# Altium PCB PCB1.PcbDoc
Units mil, origin at the board's own origin, x right, y up, seen from the top; angles counter-clockwise.
Board outline 4490 x 6775 mil, 4 copper layers (Top Layer, Layer 1, Layer 2, Bottom Layer), stack 23.756 mil thick; 20 components, 20 nets, 85 pads, 18 vias.
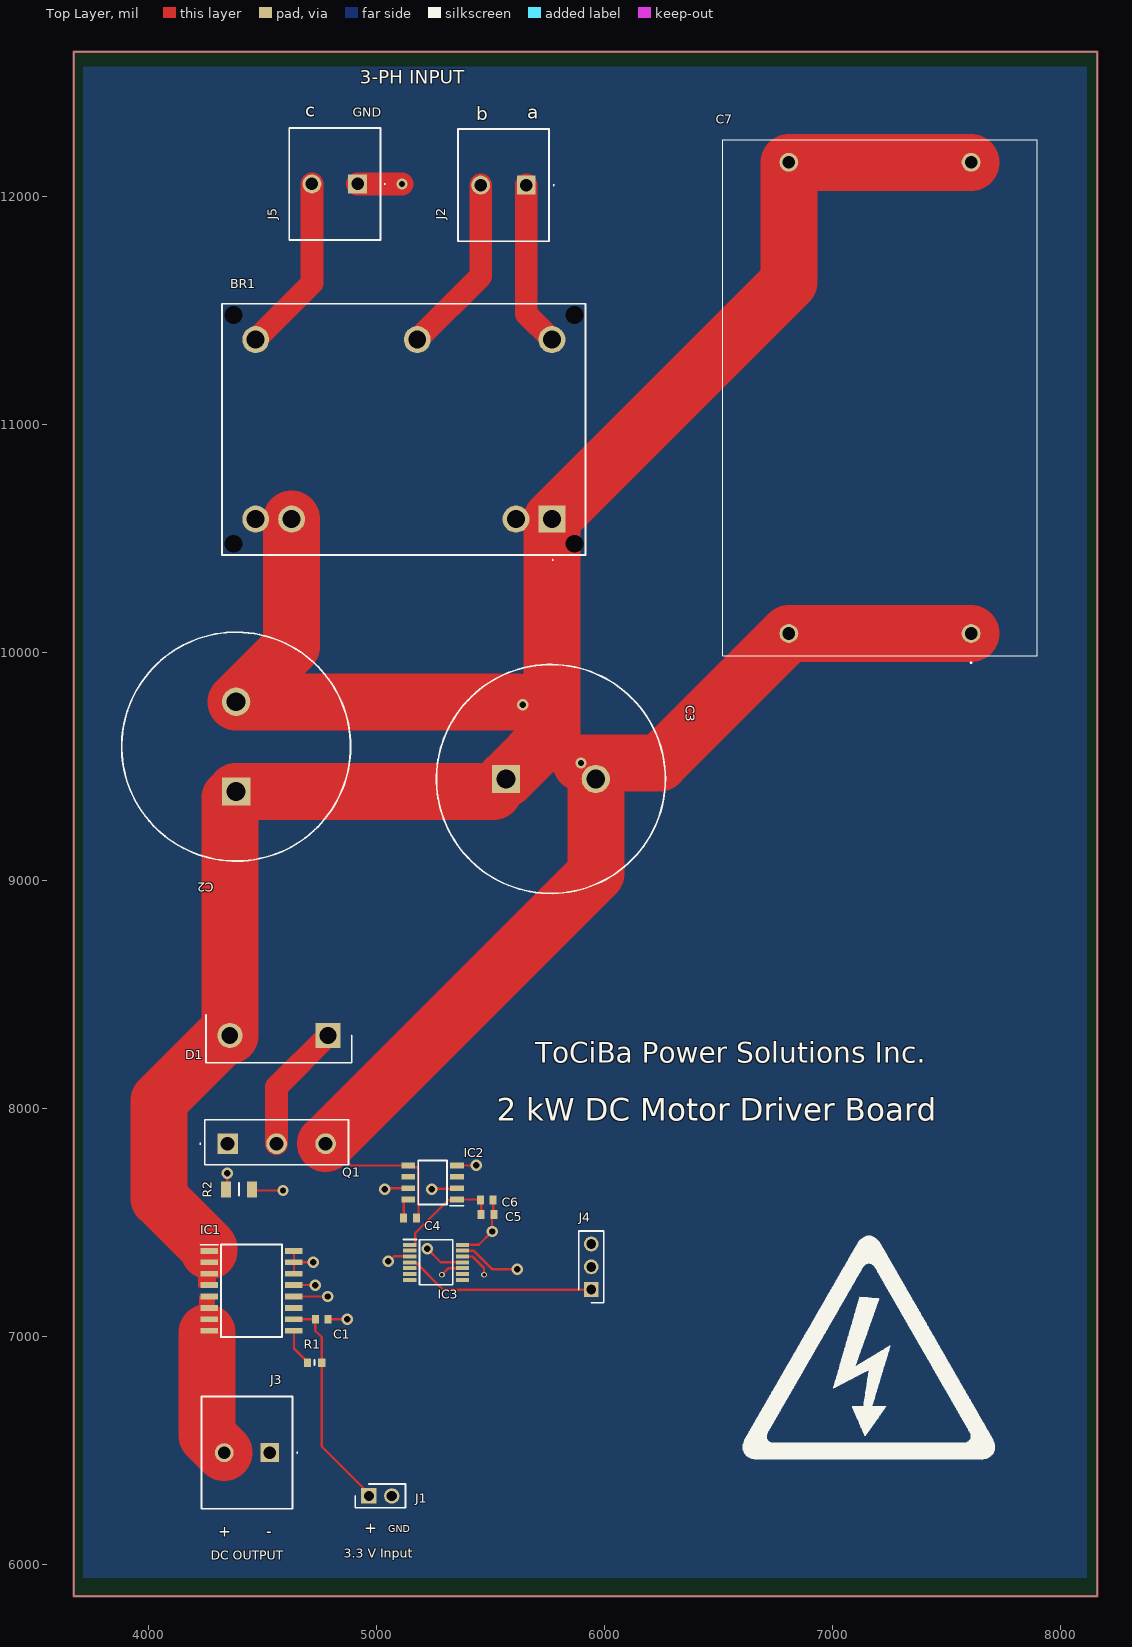
[diagram p0: Top Layer view]
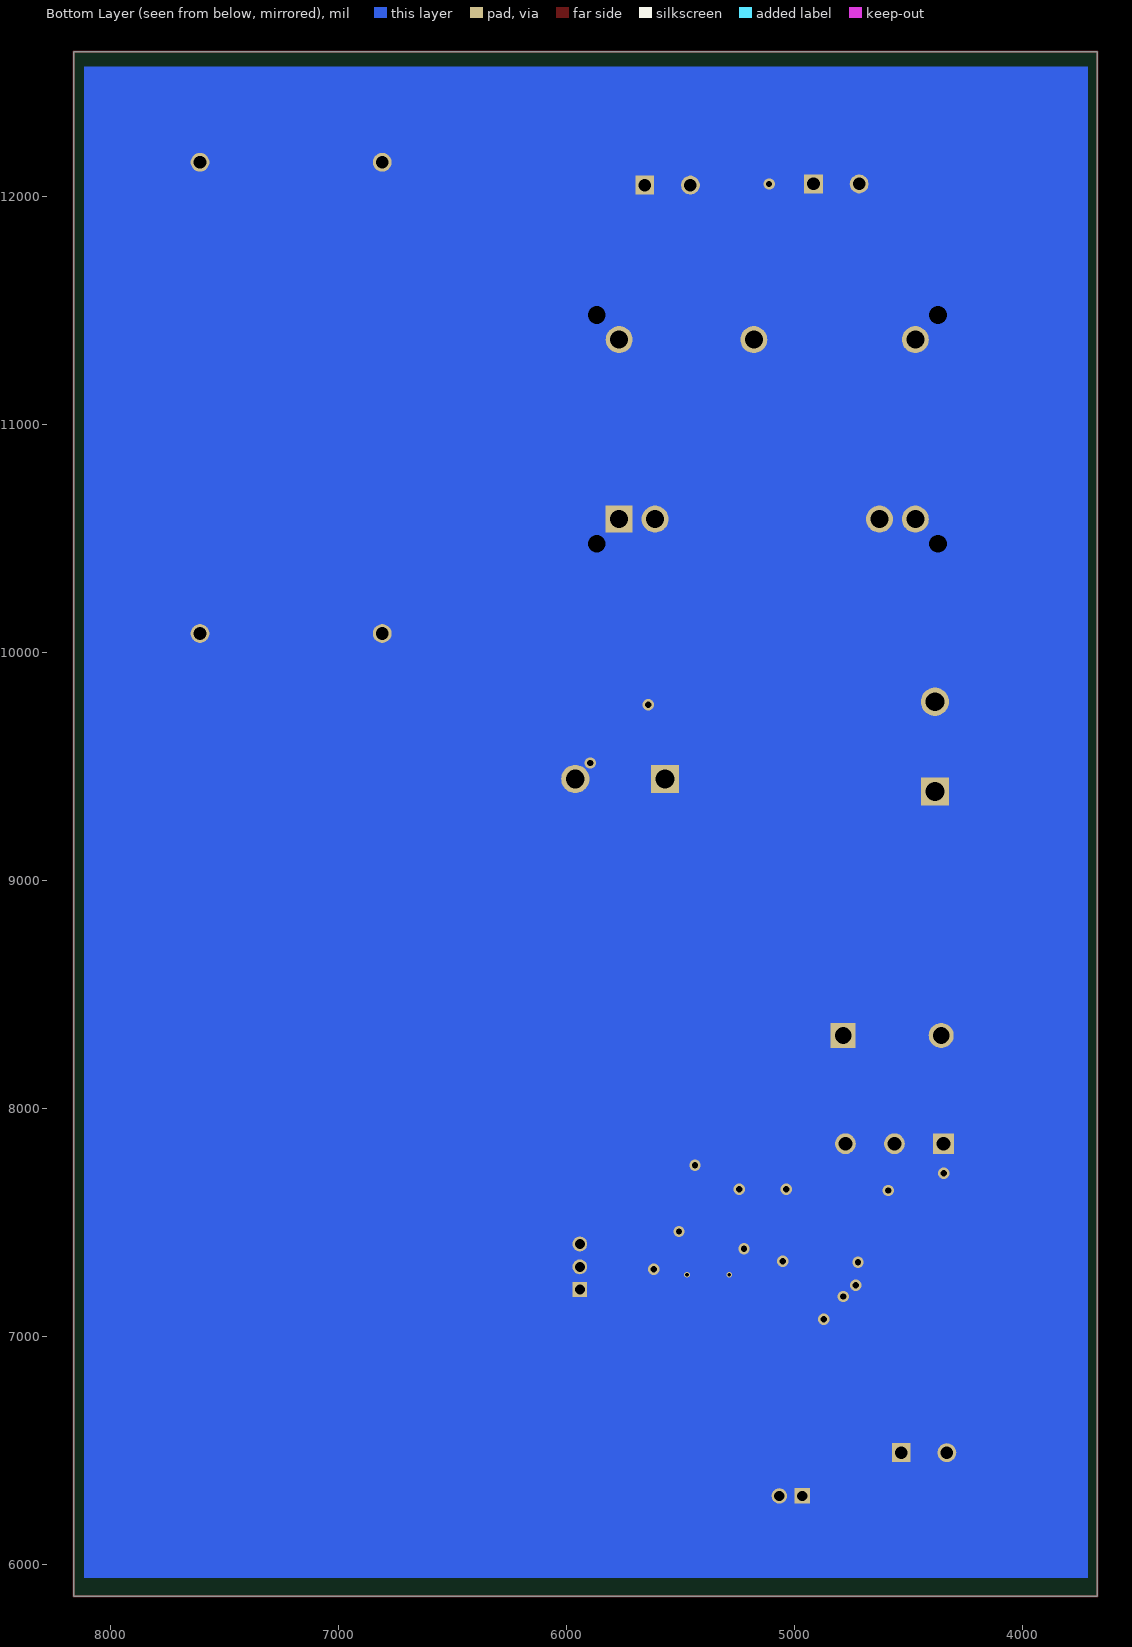
[diagram p1: Bottom Layer view, seen from below]
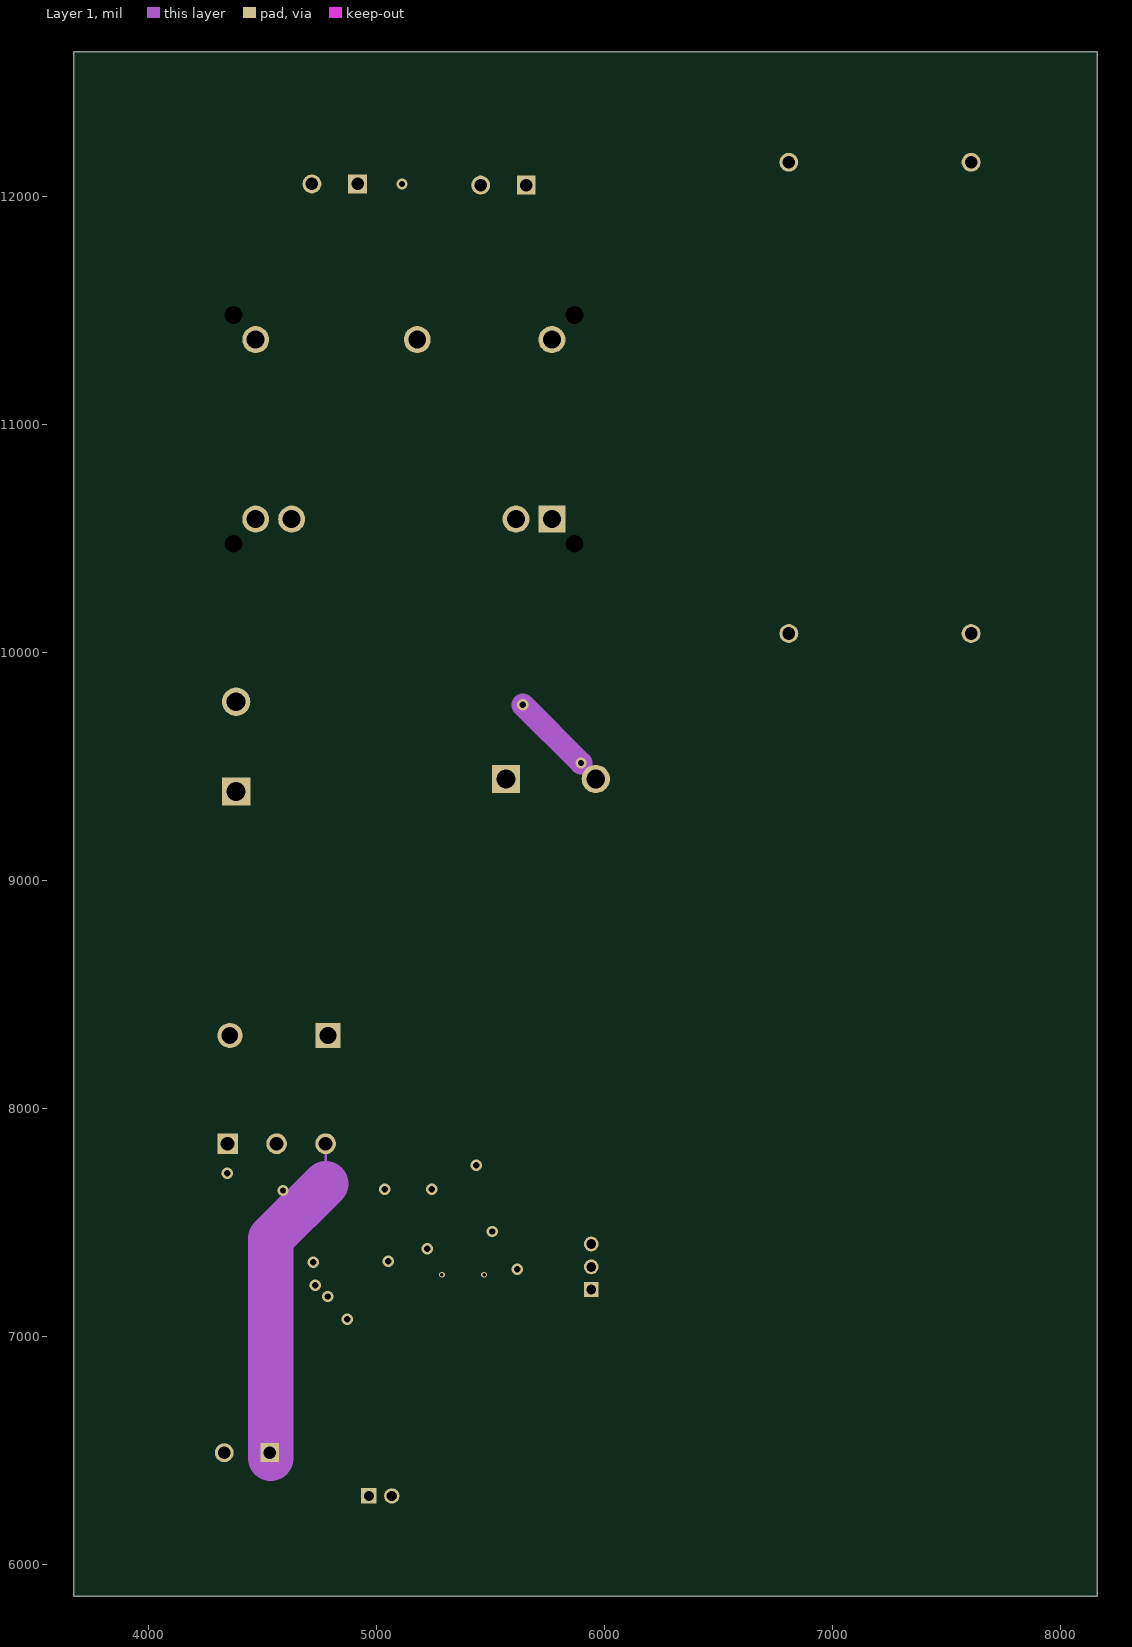
[diagram p2: Layer 1]
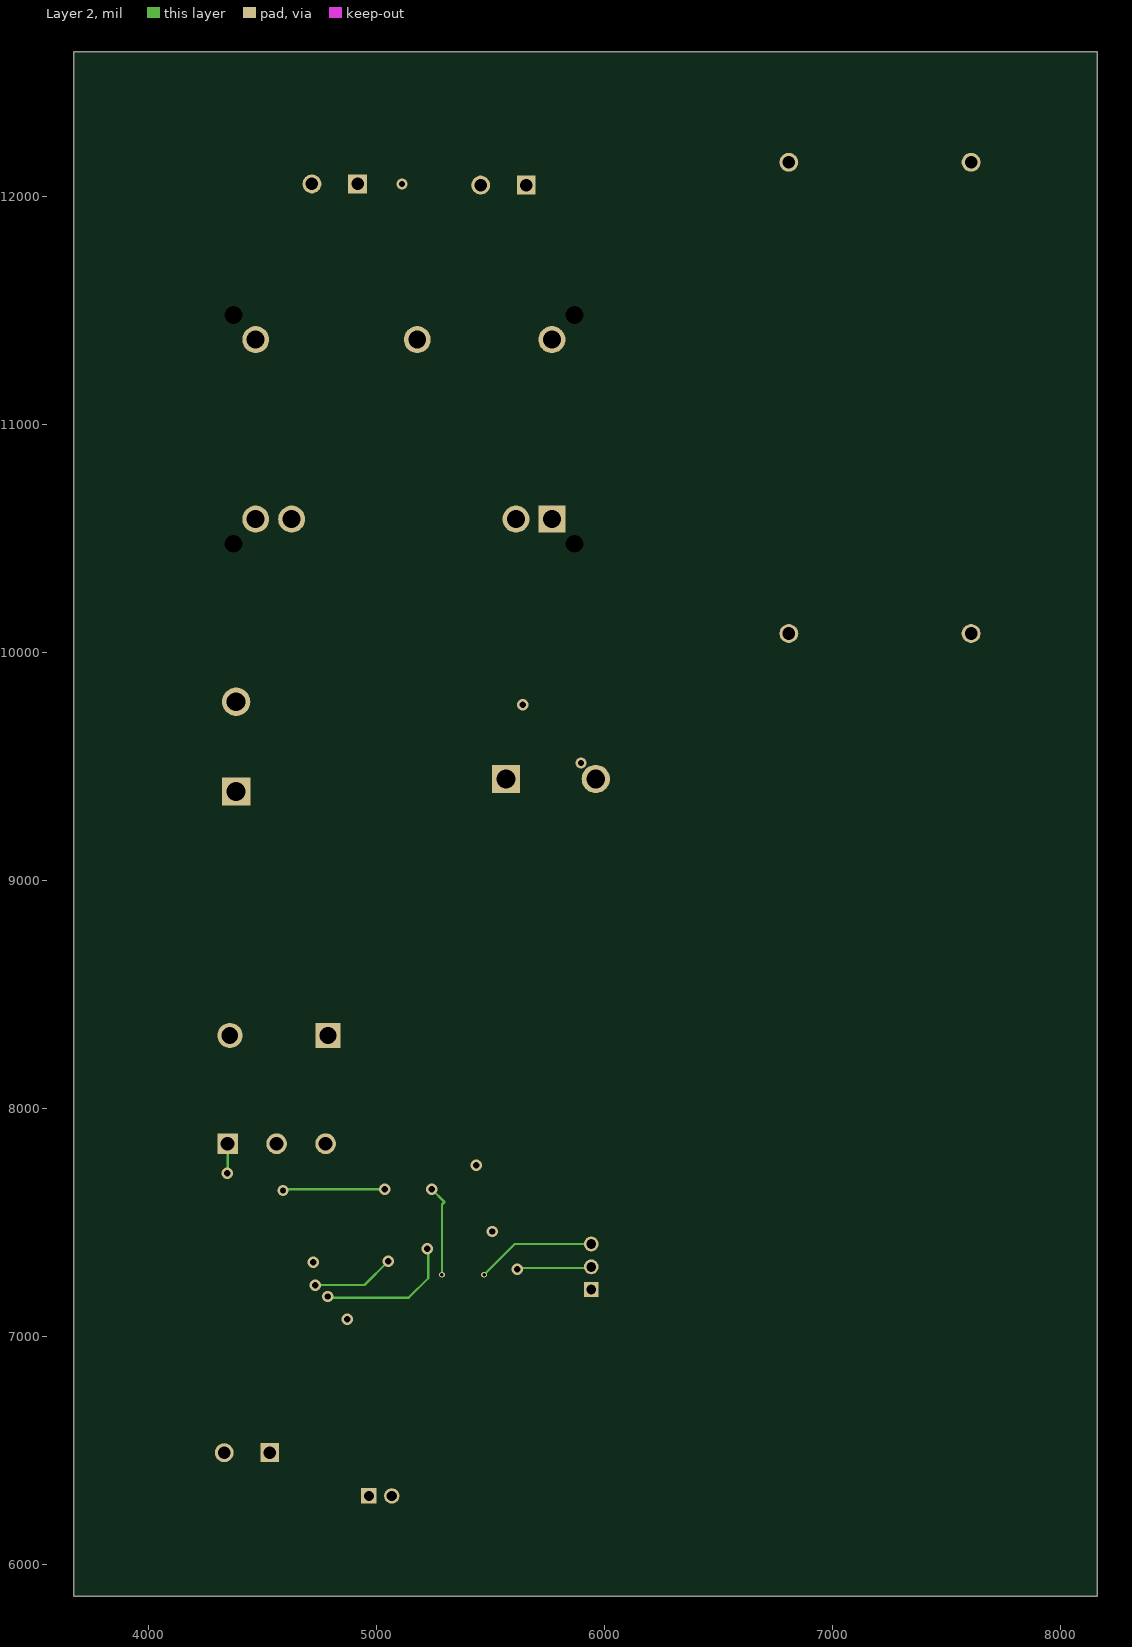
[diagram p3: Layer 2]

## Layer stack, top to bottom
Top Solder: solder mask 0.4, Solder Resist, Dk 3.5
Top Layer: signal copper 1.4
Dielectric 2: prepreg 2.8, PP-006, Dk 4.1
Layer 1: signal copper 1.378
Dielectric 1: dielectric 12.6, FR-4, Dk 4.8
Layer 2: signal copper 1.378
Dielectric 3: prepreg 2.8, PP-006, Dk 4.1
Bottom Layer: signal copper 1.4
Bottom Solder: solder mask 0.4, Solder Resist, Dk 3.5

## Board outline
3670,5860 3670,12635 8160,12635 8160,5860

## Design rules (kind name [scope] priority, off if disabled: settings)
AssemblyTestPointUsage [All] p1 off:
AssemblyTestpoint [All] p1 off: testpointundercomponent=TRUE minsize=40 maxsize=100 preferedsize=60 minholesize=0 maxholesize=40 preferedholesize=32 testpointgrid=1 usegrid=TRUE gridtolerance=0.01 allowsidetop=TRUE allowsidebottom=TRUE
Clearance Clearance_1 [All] p1 off: gap=10 ignorepadtopadclearanceinfootprint=FALSE except(0: Arc-Hole Track-Hole SMDPad-Hole THPad-Hole Via-Hole Fill-Hole Poly-Hole Region-Hole Text-Hole)
Clearance [All] p2 off: gap=50 ignorepadtopadclearanceinfootprint=FALSE
ComponentClearance [All] p1 off: gap=10 collisioncheckmode=3 verticalgap=10 showdistances=FALSE
DiffPairsRouting [All] p1 off: maxlimit=10 minlimit=10 mostfreqgap=10 toplayer_minwidth=15 toplayer_maxwidth=15 toplayer_prefwidth=15 midlayer1_minwidth=15 midlayer1_maxwidth=15 midlayer1_prefwidth=15 midlayer2_minwidth=15 midlayer2_maxwidth=15 midlayer2_prefwidth=15 bottomlayer_minwidth=15 bottomlayer_maxwidth=15 bottomlayer_prefwidth=15 maxuncoupledlength=500
FabricationTestPointUsage [All] p1 off: valid=0 allowmultiple=FALSE
FabricationTestpoint [All] p1 off: side=3 testpointundercomponent=TRUE minsize=40 maxsize=100 preferedsize=60 minholesize=0 maxholesize=40 preferedholesize=32 testpointgrid=1 allowsidetop=TRUE allowsidebottom=TRUE usegrid=TRUE gridtolerance=0.01
FanoutControl Fanout_BGA [IsBGA] p1 off: bgadir=Out bgaviamode=Centered fanoutstyle=Auto fanoutdirection=Alternating viagrid=1 // Fanout_BGA (Default Rule)
FanoutControl Fanout_LCC [IsLCC] p2 off: bgadir=Out bgaviamode=Centered fanoutstyle=Auto fanoutdirection=Alternating viagrid=1 // Fanout_LCC (Default Rule)
FanoutControl Fanout_SOIC [IsSOIC] p3 off: bgadir=Out bgaviamode=Centered fanoutstyle=Auto fanoutdirection=Alternating viagrid=1 // Fanout_SOIC (Default Rule)
FanoutControl Fanout_Small [(CompPinCount < 5)] p4 off: bgadir=Out bgaviamode=Centered fanoutstyle=Auto fanoutdirection=OutThenIn viagrid=1 // Fanout_Small (Default Rule)
FanoutControl Fanout_Default [All] p5 off: bgadir=Out bgaviamode=Centered fanoutstyle=Auto fanoutdirection=Alternating viagrid=1 // Fanout_Default (Default Rule)
Height [All] p1 off: minheight=0 maxheight=1000 prefheight=500
HoleSize [All] p1 off: absolutevalues=TRUE maxlimit=100 minlimit=1 maxpercent=80.000 minpercent=20.000
HoleToHoleClearance [All] p1 off: gap=10 allowstackedmicrovias=TRUE
LayerPairs [All] p1 off: enforce=TRUE
MinimumSolderMaskSliver [All] p1 off: minsoldermaskwidth=10
NetAntennae [All] p1 off: netantennaetolerance=0
PasteMaskExpansion [All] p1 off: expansion=0
PlaneClearance [All] p1 off: clearance=20
PlaneConnect [All] p1 off: planeconnectstyle=Relief reliefexpansion=20 reliefentries=4 reliefconductorwidth=10 reliefairgap=10
PolygonConnect [All] p1 off: connectstyle=Relief reliefconductorwidth=10 reliefentries=4 polygonreliefangle="90 Angle" airgapwidth=10
RoutingCorners [All] p1 off: cornerstyle=45-Degree minsetback=100 maxsetback=100
RoutingLayers [All] p1 off: top layer_v5=TRUE mid layer 1_v5=TRUE mid layer 2_v5=TRUE bottom layer_v5=TRUE
RoutingPriority [All] p1 off: routingpriority=0
RoutingTopology [All] p1 off: topology=Shortest
RoutingVias [All] p1 off: holewidth=28 width=50 viastyle="Through Hole" minholewidth=28 minwidth=50 maxholewidth=28 maxwidth=50
SilkToSilkClearance [All] p1 off: silktosilkclearance=10
SilkToSolderMaskClearance [IsPad] p1 off: minsilkscreentomaskgap=10 clearancetoexposedcopper=TRUE
SolderMaskExpansion [All] p1 off: expansion=4 istentingtop=FALSE
UnpouredPolygon [All] p1 off:
Width [All] p1 off: maxlimit=10 minlimit=10 preferedwidth=10
3 further rules are at their usual default settings.

## Components (designator, comment, footprint, x,y, rotation, side; value= is the part's Value field where it differs from the comment)
BR1 "SK70D08" SK70D08 5767.48,10585 r180 top
C1 "CL10B104KB8NNNC" CAPC1608X90N 4757.44,7075 r0 top
C2 "B43547A9107M000" CAPPRD1000W190D2550H2700 4382.34,9390 r90 top
C3 "B43547A9107M000" CAPPRD1000W190D2550H2700 5566.3,9445 r0 top
C4 "GRM188C80G106KE47D" CAPC1608X90N 5145,7520 r0 top
C5 "06032A101FAT2A" CAPC1608X90N 5485,7535 r0 top
C6 "06033C393KAT2A" CAPC1608X90N 5482.56,7598.16 r0 top
C7 "C4AEGBW6100A3NJ" C4AEGBW6100A3NJ 7606.14,10083.07 r90 top
D1 "DSEI30-06A" TO1092P530X1586X2594-2P 4784.92,8320 r180 top
IC1 "ACS37002KMABTR-050B5-00" SOIC127P1030X265-16N 4450,7200 r0 top
IC2 "NCD57085DR2G" SOIC127P600X175-8N 5244.22,7675 r180 top
IC3 "PIC16F1614-E_ST" SOP65P640X120-14N 5260,7325 r0 top
J1 "M20-9990246" HDRV2W66P0X254_1X2_508X254X874P 4965,6300 r0 top
J2 "2MA-02" 2MA02 5655,12050 r180 top
J3 "2MA-02" 2MA02 4530,6490 r180 top
J4 "G800LR305018EU" HDRV3W64P0X254_1X3_762X250X1082P 5940,7205 r90 top
J5 "2MA-02" 2MA02 4915,12055 r180 top
Q1 "IXGH30N60C2D1" IXGH30N60C2D1 4345.04,7845 r0 top
R1 "CR0603-FX-1002GLF" RESC1608X55N 4726.5,6885 r0 top
R2 "KTR18EZPF2R20" RESC3216X65N 4395,7645 r180 top

## Footprints (in the part's own frame and the unit in brackets; to place one, negate y for a bottom-side part, rotate by r counter-clockwise, add the part's x,y. Pads: shape width x height; smd on the part's side, far side on the other; paste and mask are expansions set on the pad)
2MA02 [mm]
  rect 2.1x2.1 hole 1.4: 1(0,0)
  round 2.1 hole 1.4: 2(5.08,0)
  silkscreen extent -3.1,-6.25 7.62,6.25, body extent -2.58,-6.25 8.08,6.25, height 14.97
C4AEGBW6100A3NJ [mm]
  round 2.1 hole 1.4: 1(0,0) 2(52.5,0) 3(52.5,20.3) 4(0,20.3)
  silkscreen extent -3.3,-7.35 55,27.65, body extent -2.5,-7.35 55,27.65, height 50.1
CAPC1608X90N [mm]
  rect 0.78x0.99 smd: 1(-0.7,0) 2(0.7,0)
  body extent -0.8,-0.41 0.8,0.41, height 0.9
CAPPRD1000W190D2550H2700 [mm]
  rect 3.15x3.15 hole 2.1: 1(0,0)
  round 3.15 hole 2.1: 2(10,0)
  silkscreen extent -7.75,-12.75 17.75,12.75, body extent -12.41,-17.41 22.41,17.41, height 28
HDRV2W66P0X254_1X2_508X254X874P [mm]
  rect 1.725x1.725 hole 1.15: 1(0,0)
  round 1.725 hole 1.15: 2(2.54,0)
  silkscreen extent -1.52,-1.32 4.06,1.32, body extent -1.27,-1.27 3.81,1.27, height 8.74
HDRV3W64P0X254_1X3_762X250X1082P [mm]
  rect 1.65x1.65 hole 1.1: 1(0,0)
  round 1.65 hole 1.1: 2(2.54,0) 3(5.08,0)
  silkscreen extent -1.47,-1.4 6.55,1.4, body extent -1.27,-1.25 6.35,1.25, height 10.62
IXGH30N60C2D1 [mm]
  rect 2.31x2.31 hole 1.54: 1(0,0)
  round 2.31 hole 1.54: 2(5.46,0) 3(10.92,0)
  silkscreen extent -3.1,-2.33 13.46,2.67, body extent -2.54,-2.33 13.46,2.67, height 26.06
RESC1608X55N [mm]
  rect 0.8x0.95 smd: 1(-0.8,0) 2(0.8,0)
  silkscreen extent 0,-0.3 0,0.3, body extent -0.8,-0.01 0.8,0.54, height 0.39
RESC3216X65N [mm]
  rect 1.15x1.8 smd: 1(-1.45,0) 2(1.45,0)
  silkscreen extent 0,-0.7 0,0.7, body extent -1.6,-0.8 1.6,0.8, height 0.65
SK70D08 [mm]
  rect 3x3 hole 2: 1(0,0)
  round 3 hole 2: 2(4,0) 7(29,0) 8(33,0) 9(0,-20) 12(15,-20) 16(33,-20)
  round 1 hole 2 unplated: MH1(-2.5,2.75) MH2(35.5,2.75) MH3(-2.5,-22.75) MH4(35.5,-22.75)
  silkscreen extent -3.75,-24 36.75,4.6, body extent -3.75,-24 36.75,4, height 12.1
SOIC127P600X175-8N [mm]
  rect 1.525x0.65 smd: 1(-2.712,1.905) 2(-2.712,0.635) 3(-2.712,-0.635) 4(-2.712,-1.905) 5(2.712,-1.905) 6(2.712,-0.635) 7(2.712,0.635) 8(2.712,1.905)
  silkscreen extent -3.47,-2.45 1.6,2.58, body extent -3,-2.45 3,2.45, height 1.75
SOIC127P1030X265-16N [mm]
  rect 1.95x0.65 smd: 1(-4.725,4.445) 2(-4.725,3.175) 3(-4.725,1.905) 4(-4.725,0.635) 5(-4.725,-0.635) 6(-4.725,-1.905) 7(-4.725,-3.175) 8(-4.725,-4.445) 9(4.725,-4.445) 10(4.725,-3.175) 11(4.725,-1.905) 12(4.725,-0.635) 13(4.725,0.635) 14(4.725,1.905) 15(4.725,3.175) 16(4.725,4.445)
  silkscreen extent -5.7,-5.15 3.4,5.15, body extent -5.15,-5.15 5.15,5.15, height 2.65
SOP65P640X120-14N [mm]
  rect 1.475x0.45 smd: 1(-2.938,1.95) 2(-2.938,1.3) 3(-2.938,0.65) 4(-2.938,0) 5(-2.938,-0.65) 6(-2.938,-1.3) 7(-2.938,-1.95) 8(2.938,-1.95) 9(2.938,-1.3) 10(2.938,-0.65) 11(2.938,0) 12(2.938,0.65) 13(2.938,1.3) 14(2.938,1.95)
  silkscreen extent -3.67,-2.5 1.85,2.53, body extent -3.2,-2.5 3.2,2.5, height 1.2
TO1092P530X1586X2594-2P [mm]
  rect 2.79x2.79 hole 1.86: 1(0,0)
  round 2.79 hole 1.86: 2(10.92,0)
  silkscreen extent -2.66,-2.27 13.58,3.03, body extent -2.47,-2.26 13.39,3.04, height 25.61

## Part data
BR1: "Bridge Rectifier", Manufacturer_Name=Semikron, Datasheet Link=https://shop.semikron-danfoss.com/thyristor-dioden-module/semitop-/sk-70-d-08.html, Height=12mm, Manufacturer_Part_Number=SK70D08
C1: "Capacitor", Manufacturer_Name=SAMSUNG, Mouser Part Number=187-CL10B104KB8NNNC, Arrow Part Number=CL10B104KB8NNNC, Arrow Price/Stock=https://www.arrow.com/en/products/cl10b104kb8nnnc/samsung-electro-mechanics?region=nac, Datasheet Link=https://datasheet.datasheetarchive.com/originals/distributors/Datasheets-DGA10/2408969.pdf, Height=0.9mm, Manufacturer_Part_Number=CL10B104KB8NNNC, Mouser Price/Stock=https://www.mouser.co.uk/ProductDetail/Samsung-Electro-Mechanics/CL10B104KB8NNNC?qs=349EhDEZ59rvGc2rLwVOdA%3D%3D
C2 C3: "Capacitor Polarised", Manufacturer_Name=TDK, Mouser Part Number=871-B43547A9107M000, Datasheet Link=https://datasheet.datasheetarchive.com/originals/distributors/Datasheets_SAMA/cd912998c374446e8a207df35f28d060.pdf, Height=27mm, Manufacturer_Part_Number=B43547A9107M000, Mouser Price/Stock=https://www.mouser.co.uk/ProductDetail/EPCOS-TDK/B43547A9107M000?qs=OiaALIbqWFRvXNUybej1lA%3D%3D
C4: "Capacitor", Manufacturer_Name="Murata Electronics", Mouser Part Number=81-GRM188C80G106KE7D, Arrow Part Number=GRM188C80G106KE47D, Arrow Price/Stock=https://www.arrow.com/en/products/grm188c80g106ke47d/murata-manufacturing?region=nac, Datasheet Link=http://componentsearchengine.com/Datasheets/1/GRM188C80G106KE47D.pdf, Height=0.9mm, Manufacturer_Part_Number=GRM188C80G106KE47D, Mouser Price/Stock=https://www.mouser.co.uk/ProductDetail/Murata-Electronics/GRM188C80G106KE47D?qs=eeBpzGFlv%252B88kEI%2FLClYhQ%3D%3D
C5: "Capacitor", Manufacturer_Name="Kyocera AVX", Mouser Part Number=581-06032A101FAT2A, Datasheet Link=https://au.mouser.com/datasheet/2/40/C0GNP0_KGM-3216332.pdf, Height=0.9mm, Manufacturer_Part_Number=06032A101FAT2A, Mouser Price/Stock=https://www.mouser.co.uk/ProductDetail/KYOCERA-AVX/06032A101FAT2A?qs=%252BdQmOuGyFcFRs1jGRy%252Bx8A%3D%3D
C6: "Capacitor", Manufacturer_Name="Kyocera AVX", Mouser Part Number=581-06033C393K, Arrow Part Number=06033C393KAT2A, Arrow Price/Stock=https://www.arrow.com/en/products/06033c393kat2a/avx, Datasheet Link=https://componentsearchengine.com/Datasheets/1/06031A100FAT2A.pdf, Height=0.9mm, Manufacturer_Part_Number=06033C393KAT2A, Mouser Price/Stock=https://www.mouser.com/Search/Refine.aspx?Keyword=581-06033C393K
C7: "Capacitor", Manufacturer_Name=NISSEI, Height=50mm, Manufacturer_Part_Number=C4AEGBW6100A3NJ
D1: "Diode", Manufacturer_Name=LITTELFUSE, Mouser Part Number=747-DSEI30-06A, Arrow Part Number=DSEI30-06A, Arrow Price/Stock=https://www.arrow.com/en/products/dsei30-06a/littelfuse?region=europe, Datasheet Link=https://componentsearchengine.com/Datasheets/1/DSEI30-06A.pdf, Height=5.3mm, Manufacturer_Part_Number=DSEI30-06A, Mouser Price/Stock=https://www.mouser.co.uk/ProductDetail/IXYS/DSEI30-06A?qs=t7yjd2JO%2FgQS8P%252B4%2Fp1LgQ%3D%3D
IC1: "Integrated Circuit", Manufacturer_Name="Allegro Microsystems", Datasheet Link=https://www.allegromicro.com/en/products/sense/current-sensor-ics/zero-to-fifty-amp-integrated-conductor-sensor-ics/acs37002, Height=2.65mm, Manufacturer_Part_Number=ACS37002KMABTR-050B5-00
IC2: "Integrated Circuit", Manufacturer_Name=onsemi, Mouser Part Number=863-NCD57085DR2G, Datasheet Link=https://componentsearchengine.com/Datasheets/2/NCD57085DR2G.pdf, Height=1.75mm, Manufacturer_Part_Number=NCD57085DR2G, Mouser Price/Stock=https://www.mouser.co.uk/ProductDetail/onsemi/NCD57085DR2G?qs=iLbezkQI%252Bsho7DsU0W3Vvg%3D%3D
IC3: "Integrated Circuit", Arrow Part Number=PIC16F1614-E/ST, Manufacturer_Name=Microchip, Mouser Part Number=579-PIC16F1614-E/ST, Arrow Price/Stock=https://www.arrow.com/en/products/pic16f1614-est/microchip-technology, Datasheet Link=http://www.microchip.com/mymicrochip/filehandler.aspx?ddocname=en572830, Height=1.2mm, Manufacturer_Part_Number=PIC16F1614-E/ST, Mouser Price/Stock=https://www.mouser.co.uk/ProductDetail/Microchip-Technology/PIC16F1614-E-ST?qs=7PCaVhlmG1qOwWgwKHE1Tg%3D%3D
J1: "Connector", Manufacturer_Name=Harwin, Mouser Part Number=855-M20-9990246, Datasheet Link=https://cdn.harwin.com/pdfs/M20-999.pdf, Height=8.74mm, Manufacturer_Part_Number=M20-9990246, Mouser Price/Stock=https://www.mouser.co.uk/ProductDetail/Harwin/M20-9990246?qs=Jph8NoUxIfWjw4WmyRvzag%3D%3D
J2 J3 J5: "Connector", Manufacturer_Name="TE Connectivity", Mouser Part Number=571-15460742, Datasheet Link=https://octopart.com/datasheet/2ma-02-te+connectivity-39650644, Height=15.3mm, Manufacturer_Part_Number=2MA-02, Mouser Price/Stock=https://www.mouser.co.uk/ProductDetail/TE-Connectivity/2MA-02?qs=tYnqtB6%252BMT5HYbRtwiMoEw%3D%3D
J4: "Connector", Manufacturer_Name="Amphenol Communications Solutions", Mouser Part Number=523-G800LR305018EU, Datasheet Link=https://cdn.amphenol-cs.com/media/wysiwyg/files/documentation/datasheet/boardwiretoboard/bwb_agilbrick_2_54mm_btb_header_g800.pdf, Height=10.82mm, Manufacturer_Part_Number=G800LR305018EU, Mouser Price/Stock=https://www.mouser.co.uk/ProductDetail/Amphenol-Commercial-Products/G800LR305018EU?qs=PzGy0jfpSMsZaVkTJmYyRA%3D%3D
Q1: "Transistor IGBT", Manufacturer_Name=LITTELFUSE, Datasheet Link=https://pdf1.alldatasheet.com/datasheet-pdf/download/415159/IXYS/IXGH30N60C2D1.html, Height=25.96mm, Manufacturer_Part_Number=IXGH30N60C2D1
R1: "Resistor", Manufacturer_Name=Bourns, Mouser Part Number=652-CR0603FX-1002GLF, Arrow Part Number=CR0603-FX-1002GLF, Arrow Price/Stock=https://www.arrow.com/en/products/cr0603-fx-1002glf/bourns, Datasheet Link=https://www.bourns.com/pdfs/chpreztr.pdf, Height=0.55mm, Manufacturer_Part_Number=CR0603-FX-1002GLF, Mouser Price/Stock=https://www.mouser.com/Search/Refine.aspx?Keyword=652-CR0603FX-1002GLF
R2: "Resistor", Manufacturer_Name="ROHM Semiconductor", Mouser Part Number=755-KTR18EZPF2R20, Datasheet Link=http://rohmfs.rohm.com/en/products/databook/datasheet/passive/resistor/chip_resistor/ktr.pdf, Height=0.65mm, Manufacturer_Part_Number=KTR18EZPF2R20, Mouser Price/Stock=https://www.mouser.co.uk/ProductDetail/ROHM-Semiconductor/KTR18EZPF2R20?qs=Y0Uzf4wQF3nRNQ%2FJtyiNSA%3D%3D

## Via types
v1: diameter 50, hole 28, Top Layer to Bottom Layer, 16 vias
v2: diameter 25, hole 16, Top Layer to Bottom Layer, 2 vias

## Nets (pads, with @x,y where several pads share a name; then routed paths per layer and width w, separated by ;. In a path a pad name is that pad's centre, name@x,y a point inside that pad or via, vN(x,y) a via of type N, cw(c..) or ccw(c..) an arc to the next point about the centre after c; other vN are vias at no path point)
GND: C1.2 C5.2 C6.2 IC1.14 IC1.15 IC1.16 IC2.4 IC3.14 J1.2 J5.1 | length 843.7
  Top Layer w10: IC1.14 IC1.15 ; IC1.16 IC1.15 ; v1(4720,7325) IC1.15 ; C1.2 v1(4870,7075) ; IC2.4 v1(5435,7750) ; IC3.14 5446.77,7401.77 v1(5505,7460) 5505,7527.44 C5.2 5510.12,7537.44 C6.2
  Top Layer w100: J5.1 v1(5110,12055)
Ip-: IC1.5 IC1.6 IC1.7 IC1.8 J3.2 | length 789.9
  Top Layer w10: IC1.5 IC1.6 IC1.7 IC1.8 4289.57,7025 4330,6984.57
  Top Layer w250: IC1.8@4255,7016.02 4255,6565 J3.2
NetBR1_1: BR1.1 C2.1 C3.1 C7.2 C7.3 D1.2 IC1.1 IC1.2 IC1.3 IC1.4 | length 7484.9
  Top Layer w10: C2.1@4355,9362.66 C2.1 ; C3.1@5511.3,9390 C3.1
  Top Layer w100: D1.2@4328.12,8318.12 4353.12,8318.12 D1.2
  Top Layer w250: IC1.1 4263.98,7386.02 4045,7605 4045,8035 D1.2@4328.12,8318.12 ; D1.2 C2.1@4355,9362.66 ; C2.1 C3.1@5511.3,9390 ; C3.1 5767.48,9646.18 BR1.1 6806.92,11624.44 C7.3 C7.2
NetBR1_9: BR1.9 J2.1 | length 724.2
  Top Layer w100: J2.1 5655,11484.88 BR1.9
NetBR1_12: BR1.12 J2.2 | length 792.8
  Top Layer w100: BR1.12 5455,11650.47 J2.2
NetBR1_16: BR1.16 J5.2 | length 784.8
  Top Layer w100: BR1.16 4715,11619.13 J5.2
NetC1_1: C1.1 IC1.10 J1.1 R1.2 | length 991.6
  Top Layer w10: IC1.10 C1.1 4729.88,7025.12 4757.99,6997.01 R1.2 4757.99,6517.01 J1.1@4990,6285
NetC4_1: C4.1 IC2.8 | length 95.4
  Top Layer w10: C4.1 5117.44,7592.2 5125.24,7600 IC2.8
NetC5_1: C5.1 C6.1 IC2.1 IC3.1 | length 464.9
  Top Layer w10: IC3.1 5164.51,7401.77 5168.37,7405.63 5168.37,7453.37 5311.83,7596.83 5347.83,7596.83 IC2.1 ; IC2.1@5371.77,7600 5453.16,7600 C6.1 5457.44,7595.72 C5.1
NetD1_1: D1.1 Q1.2 | length 568.2
  Top Layer w100: Q1.2 4560,8095.08 D1.1
NetIC1_12: IC1.12 IC3.11 | length 938.8
  Top Layer w10: IC1.12 v1(4785,7175) ; v1(5220,7385) 5280,7325 IC3.11
  Layer 2 w10: v1(4785,7175) 4790,7170 5140,7170 5225,7255 5225,7380 v1(5220,7385)
NetIC2_2: IC2.2 IC3.10 | length 618.6
  Top Layer w10: v1(5240,7645) 5242.5,7647.5 5348.49,7647.5 IC2.2 ; v2(5285,7270) 5314.41,7299.41 IC3.10
  Layer 2 w10: v1(5240,7645) 5295.86,7589.14 5285,7578.28 v2(5285,7270)
NetJ4_1: IC3.4 J4.1 | length 845.4
  Top Layer w10: IC3.4 5147.72,7321.61 5173.39,7321.61 5290,7205 J4.1
NetJ4_2: IC3.13 J4.2 | length 602.1
  Top Layer w10: IC3.13 5423.82,7376.18 5505,7295 v1(5615,7295)
  Layer 2 w10: v1(5615,7295) 5620,7300 5935,7300 J4.2
NetJ4_3: IC3.12 J4.3 | length 676.2
  Top Layer w10: IC3.12 5419.41,7350.59 5470,7300 v2(5470,7270)
  Layer 2 w10: v2@5465,7270 v2(5470,7270) 5605,7405 J4.3
NetQ1_1: Q1.1 R2.2 | length 204.2
  Top Layer w10: R2.2 4342.95,7650.04 v1(4342.95,7715.04) ; Q1.1@4340,7839.96 Q1.1
  Layer 2 w10: v1@4345.04,7720.04 Q1.1
NetR1_1: IC1.9 R1.1 | length 164.4
  Top Layer w10: IC1.9 4636.02,6946.93 4695,6887.95 R1.1
NetR2_1: IC2.7 R2.1 | length 680.3
  Top Layer w10: R2.1 4457.09,7640 v1(4587.91,7640) ; v1@5040,7650 IC2.7
  Layer 2 w10: v1@4590,7645 v1(5035,7645)
RA4: IC1.13 IC3.3 | length 564.8
  Top Layer w10: IC1.13 v1(4730,7225) ; v1(5050,7330) 5054.16,7330 5075.86,7351.69 IC3.3@5148.31,7351.69
  Layer 2 w10: v1(4730,7225) 4945,7225 v1(5050,7330)
return: BR1.7 C2.2 C3.2 C4.2 C7.1 C7.4 IC2.5 J3.1 Q1.3 | length 8794.5
  Top Layer w10: Q1.3 4790,7845 4885,7750 IC2.5 5145.25,7742.2 5176.08,7742.2 5181.94,7736.35 C4.2@5181.94,7533.49 ; 5615.48,9783.7 5629.18,9770 v1(5640,9770)
  Top Layer w250: BR1.7 4625.75,10027.1 C2.2 5615.48,9783.7 ; Q1.3 5960,9030.04 C3.2 ; v1(5895,9515) 6238.85,9515 C7.4 C7.1
  Layer 1 w10: 4774.96,7669.96 Q1.3 ; v1(5895,9515) 5895,9512.5 5960,9447.5 C3.2
  Layer 1 w100: v1(5640,9770) v1(5895,9515)
  Layer 1 w200: J3.1@4535,6465 4535,7430 4774.96,7669.96
pads on no net: BR1.2 BR1.8 BR1.MH1 BR1.MH2 BR1.MH3 BR1.MH4 IC1.11 IC2.3 IC2.6 IC3.2 IC3.5 IC3.6 IC3.7 IC3.8 IC3.9
copper on no net: | length 22530
  Top Layer w10: 3670,5860 8160,5860 8160,12635 3670,12635 3670,5860

## Other copper
Top Layer:
  rectangle net Ip-: 4220,7025 4289.57,7180
  rectangle net NetBR1_1: 4215,7215 4295,7395
Bottom Layer:
  rectangle net GND: 3710,5940 8115,12570

## Silkscreen, mask and mechanical layers (free items; w line width, h text height)
Top Overlay:
  drawing of 2 lines, arcs and shapes, not listed
  text "3-PH INPUT" at 4925,12495 h60
  text "c" at 4685,12350 h60
  text "GND" at 4895,12350 h40
  text "a" at 5660,12340 h60
  text "b" at 5435,12335 h60
  text "ToCiBa Power Solutions Inc." at 5695,8200 h90
  text "2 kW DC Motor Driver Board" at 5525,7945 h100
  text "GND" at 5050,6140 h30
  text "+" at 4945,6136.67 h50
  text "+" at 4305,6121.67 h50
  text "-" at 4515,6120.01 h50
  text "3.3 V Input" at 4855,6028.33 h40
  text "DC OUTPUT" at 4270,6020 h40

## Dimensions
3670,5860 to 8160,5860 on Top Overlay
8170,5880 to 8160,12635 on Top Overlay